# EAGLE board TSOC_ESP32S (EAGLE 6.6.0)
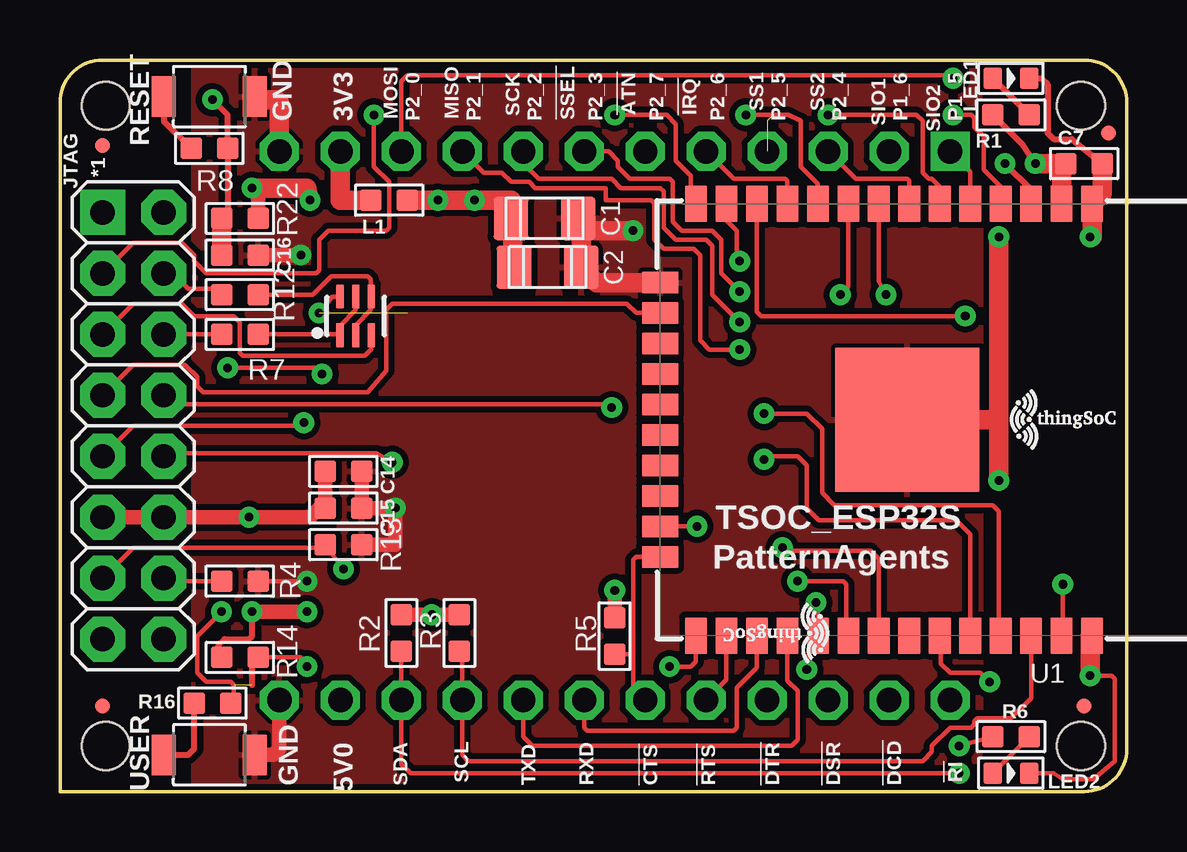
[diagram p0: board, top side]
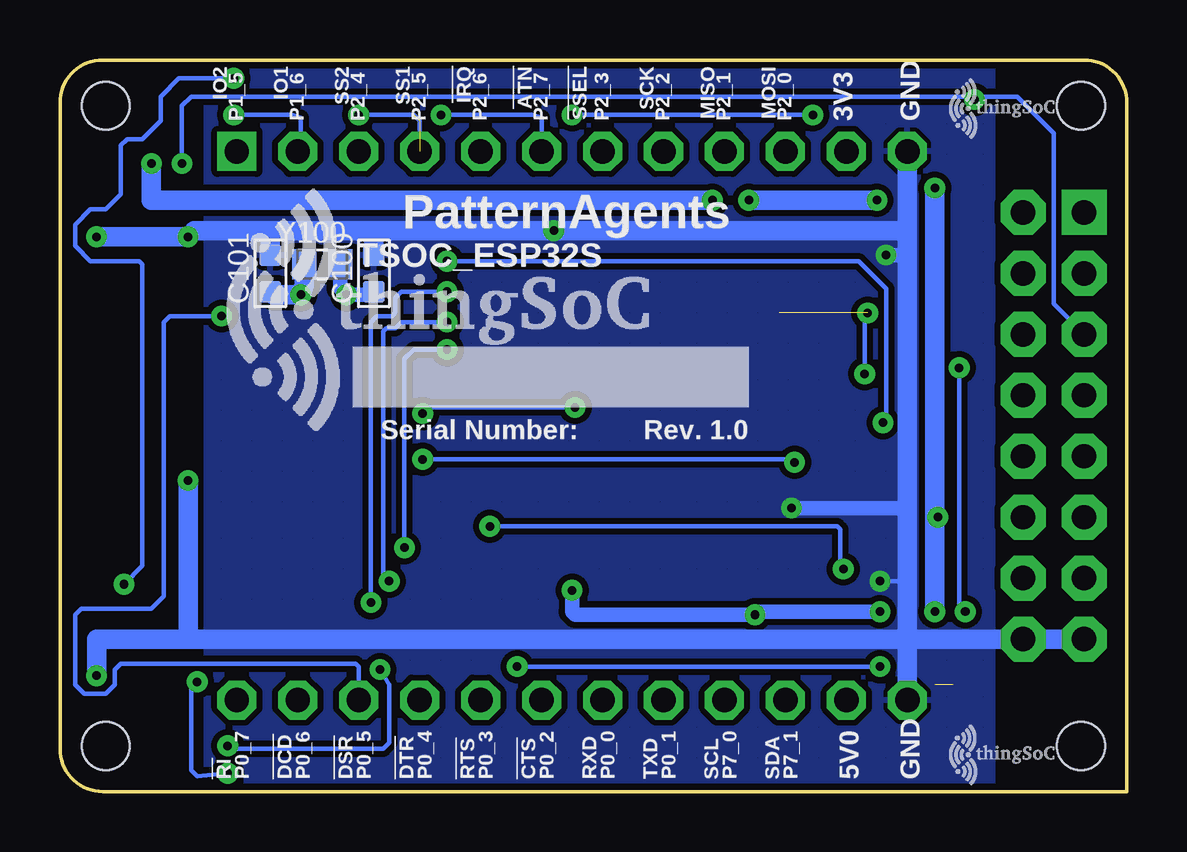
[diagram p1: board, bottom side, seen from below]

Size 44.45 x 30.48 mm. Coordinates in mm from the lower left corner, seen from the top.
Copper layers (1*16): Top 0.035mm / dielectric 1.5mm / Bottom 0.035mm
Design rules "PatternAgents_7mil": minimum track width 7mil, minimum drill 14mil, track to track 7mil, track to pad 7mil, pad to pad 7mil, via to via 7mil, smd to smd 7mil, copper to edge 7mil, drill to drill 7mil, minimum pad ring 12mil, minimum via ring 10mil, stop-mask expansion 4mil, vias tented up to drill 25mil, thermal gap 7mil
Net classes: 1 vcc: width 0.254 mm

## Footprints (pad centres in the part's own frame; a part is rotated, then mirrored left to right if it is on the bottom)
C1206 = smd 1.8 x 1.45: 1 0,1.4; 2 0,-1.4
C0603 = smd 0.889 x 0.889: 1 0,0.762; 2 0,-0.762
MICRO-FIDUCIAL = smd 0.635 x 0.635: 1 0,0
2X8 = drill 1.016 pad 1.88 square: 1 0,0 | drill 1.016 pad 1.88 octagon: 2 0,2.54; 3 2.54,0; 4 2.54,2.54; 5 5.08,0; 6 5.08,2.54; 7 7.62,0; 8 7.62,2.54; 9 10.16,0; 10 10.16,2.54; 11 12.7,0; 12 12.7,2.54; 13 15.24,0; 14 15.24,2.54; 15 17.78,0; 16 17.78,2.54
L0603 = smd 0.889 x 0.889: 1 -0.762,0; 2 0.762,0
LED-0603 = smd 0.762 x 0.889: + -0.762,0; - 0.762,0
SOT363 = smd 0.3 x 0.99: 1 -0.65,-0.8; 2 0,-0.8; 3 0.65,-0.8; 4 0.65,0.81; 5 0,0.81; 6 -0.65,0.81
R0603 = smd 0.889 x 0.889: 1 0,0.762; 2 0,-0.762
SW2-2.6-3.0X2.5X1.2+0.4MM = smd 1 x 1.7: 1 -1.9,0; 2 1.9,0
TSOC-BB-S24 = drill 1.016 square: 1B -11.43,11.43 | drill 1.016 octagon: 1C 11.43,11.43; 2B -11.43,8.89; 2C 11.43,8.89; 3B -11.43,6.35; 3C 11.43,6.35; 4B -11.43,3.81; 4C 11.43,3.81; 5B -11.43,1.27; 5C 11.43,1.27; 6B -11.43,-1.27; 6C 11.43,-1.27; 7B -11.43,-3.81; 7C 11.43,-3.81; 8B -11.43,-6.35; 8C 11.43,-6.35; 9B -11.43,-8.89; 9C 11.43,-8.89; 10B -11.43,-11.43; 10C 11.43,-11.43; 11B -11.43,-13.97; 11C 11.43,-13.97; 12B -11.43,-16.51; 12C 11.43,-16.51
ESP-32S = smd 0.9 x 1.5: 1 7.7,9; 2 6.43,9; 3 5.16,9; 4 3.89,9; 5 2.62,9; 6 1.35,9; 7 0.08,9; 8 -1.19,9; 9 -2.46,9; 10 -3.73,9; 11 -5,9; 12 -6.27,9; 13 -7.54,9; 14 -8.81,9; 25 -8.81,-9; 26 -7.54,-9; 27 -6.27,-9; 28 -5,-9; 29 -3.73,-9; 30 -2.46,-9; 31 -1.19,-9; 32 0.08,-9; 33 1.35,-9; 34 2.62,-9; 35 3.89,-9; 36 5.16,-9; 37 6.43,-9; 38 7.7,-9 | smd 1.5 x 0.9: 15 -10.3,5.715; 16 -10.3,4.445; 17 -10.3,3.175; 18 -10.3,1.905; 19 -10.3,0.635; 20 -10.3,-0.635; 21 -10.3,-1.905; 22 -10.3,-3.175; 23 -10.3,-4.445; 24 -10.3,-5.715 | smd 6 x 6: GND 0,0
TSOC-BB-BRD-DIM = hole 2: 13.335,16.891; -13.335,16.891; 13.335,-23.749; -13.335,-23.749
X2-SMD-L2.0X1.2X0.55MM = smd 1 x 1.25: 1 -0.75,0; 2 0.75,0

## Placement (x,y rotation side)
$$U$1  TSOC-LOGO-SMALL  [TSOC-LOGO-SML]  31.24,6.6 180 top
$$U$2  TSOC-LOGO-SMALL  [TSOC-LOGO-SML]  40.39,15.49 0 top
C1  47u  [C1206]  20.19,23.88 270 top
C2  47u  [C1206]  20.32,21.84 270 top
C7  10uf  [C0603]  42.67,26.16 270 top
C14  100nf  [C0603]  11.81,13.34 90 top
C15  1uf  [C0603]  11.81,11.81 90 top
C16  100nf  [C0603]  7.49,22.35 90 top
C100  12pf  [C0603]  31.37,21.59 180 bottom
C101  12pf  [C0603]  35.69,21.59 180 bottom
FID1  FIDUCIALUFIDUCIAL  [MICRO-FIDUCIAL]  43.69,27.43 0 top
FID2  FIDUCIALUFIDUCIAL  [MICRO-FIDUCIAL]  42.67,3.56 0 top
FID3  FIDUCIALUFIDUCIAL  [MICRO-FIDUCIAL]  1.78,26.92 0 top
FID4  FIDUCIALUFIDUCIAL  [MICRO-FIDUCIAL]  1.78,3.56 0 top
JTAG  [2X8]  1.78,24.13 270 top
L1  330OHM-500MA  [L0603]  13.72,24.64 180 top
LED1  GREEN-0603  [LED-0603]  39.62,29.72 0 top
LED2  YELLOW-0603  [LED-0603]  39.62,0.76 0 top
Q1  MMBT2222A  [SOT363]  12.32,19.81 0 top
R1  1K 1/10W  [R0603]  39.62,28.19 270 top
R2  10K 1/10W  [R0603]  14.22,6.6 180 top
R3  10K 1/10W  [R0603]  16.64,6.6 180 top
R4  10K 1/10W  [R0603]  7.49,8.76 270 top
R5  10K 1/10W  [R0603]  23.11,6.48 180 top
R6  1K 1/10W  [R0603]  39.62,2.29 270 top
R7  10K 1/10W  [R0603]  7.49,19.05 90 top
R8  220R  [R0603]  6.22,26.8 90 top
R12  10K 1/10W  [R0603]  7.49,20.7 90 top
R13  10K 1/10W  [R0603]  11.81,10.29 270 top
R14  10K 1/10W  [R0603]  7.49,5.59 270 top
R16  220R  [R0603]  6.35,3.68 90 top
R22  10K 1/10W  [R0603]  7.49,23.88 90 top
RESET  B3U-1000P-2P-SMD  [SW2-2.6-3.0X2.5X1.2+0.4MM]  6.22,28.96 0 top
TSOC  TSOC-24-BB  [TSOC-BB-S24]  25.65,15.24 270 top
U1  ESP-32S  [ESP-32S]  35.31,15.49 0 top
U$1  TSOC-PCB-SINGLE  [TSOC-BB-BRD-DIM]  25.65,15.24 270 top
U$100  TSOC-LOGO-LRG  [TSOC-LOGO-LRG]  34.29,20.07 0 bottom
U$101  TSOC-LOGO-SMALL  [TSOC-LOGO-SML]  6.6,28.45 0 bottom
U$102  TSOC-LOGO-SMALL  [TSOC-LOGO-SML]  6.6,1.52 0 bottom
USER  B3U-1000P-2P-SMD  [SW2-2.6-3.0X2.5X1.2+0.4MM]  6.22,1.52 0 top
Y100  3.2768KHZ  [X2-SMD-L2.0X1.2X0.55MM]  33.53,21.97 0 bottom

## Library data of the parts
$$U$1 $$U$2 TSOC U$1 U$100-U$102 = thingSoC
C1 C2 = we-rcl
C7 = Seeed-Capacitor-2016; MPN: CC0603KRX5R6BB106
C14 C16 = Seeed-Capacitor-2016; MPN: CC0603KRX7R9BB104
C15 = Seeed-Capacitor-2016; MPN: CC0603KRX7R8BB105
C100 C101 = Seeed-Capacitor-2016; MPN: CC0603JRNPO9BN120
FID1-FID4 = TSOC-ESP8266-BASE
JTAG = PatternAgents-ProtoPads
L1 = Seeed-Inductor-2016; MPN: BLM18AG121SN1D
LED1 = Seeed-LED-2016; MPN: 19-217-G7C-AN1P2-3T
LED2 = Seeed-LED-2016; MPN: 19-217-Y5C-AM1N1VY-3T
Q1 = SparkFun-DiscreteSemi
R1 R6 = Seeed-Resistor-2016; MPN: RC0603JR-071KL
R2-R5 R7 R12-R14 R22 = Seeed-Resistor-2016; MPN: RC0603JR-0710KL
R8 R16 = Seeed-Resistor-2016; MPN: RC0603JR-07220RL
RESET USER = Seeed-Switch-2016; MPN: B3U-1000P-2P-SMD
U1 = PatternAgents_RFmodules
Y100 = Seeed-Crystal Oscillator-2016; MPN: FC-12M

## Nets
3V3: L1.2 TSOC.11B
5V0: TSOC.11C
!CTS: JTAG.14 R4.2
!DBG: JTAG.1
!DSR: JTAG.2
!DTR: JTAG.6 R7.1
!RST: C16.1 JTAG.5 Q1.3 R8.2 R22.1 U1.3
!RTS: JTAG.4 R12.1
CLK: U1.20
CMD: U1.19
GND: C1.1 C2.1 C7.1 C14.2 C15.2 C16.2 C100.2 C101.2 JTAG.15 JTAG.16 LED1.- LED2.- R4.1 R13.1 RESET.2 TSOC.12B TSOC.12C U1.1 U1.15 U1.38 U1.GND USER.2
IO0: Q1.6 R14.1 R16.2 U1.25
IO1: JTAG.8 U1.35
IO2: R5.1 TSOC.6C U1.24
IO3: JTAG.10 U1.34
IO4: TSOC.5C U1.26
IO5: R6.2 TSOC.7B U1.29
IO12: JTAG.3 U1.14
IO13: JTAG.7 U1.16
IO14: JTAG.9 U1.13
IO15: JTAG.13 R13.2 U1.23
IO16: TSOC.7C U1.27
IO17: TSOC.8C U1.28
IO18: TSOC.8B U1.30
IO19: TSOC.9B U1.31
IO21: R2.1 TSOC.10C U1.33
IO22: R3.1 TSOC.9C U1.36
IO23: TSOC.10B U1.37
IO25: TSOC.6B U1.10
IO26: TSOC.5B U1.11
IO27: TSOC.3C U1.12
IO32: C101.1 U1.8 Y100.1
IO33: C100.1 U1.9 Y100.2
IO34: TSOC.4B U1.6
IO35: TSOC.3B U1.7
IO36: TSOC.2B U1.4
IO39: TSOC.1B U1.5
N$1: LED2.+ R6.1
N$2: R16.1 USER.1
N$3: R8.1 RESET.1
N$17: LED1.+ R1.1
RES: Q1.1 Q1.5 R7.2
ROS: Q1.2 Q1.4 R12.2
SD0: U1.21
SD1: U1.22
SD2: U1.17
SD3: U1.18
VCC: C1.2 C2.2 C7.2 C14.1 C15.1 JTAG.11 JTAG.12 L1.1 R1.2 R2.2 R3.2 R5.2 R14.2 R22.2 U1.2

## Tracks (layer width: path | path; a pad name or v marks a point on that pad's centre or on a via)
3V3
  Top 0.813: TSOC.11B 11.68,24.64 L1.2
!CTS
  Top 0.178: R4.2 4.45,8.76 JTAG.14
!DTR
  Top 0.178: R7.1 JTAG.6
!RST  (via drill 0.36)
  Top 0.178: Q1.3 12.97,18.43 12.7,18.16 7.62,18.16 7.49,18.29 7.49,19.56 7.24,19.81 5.59,19.81 5.08,20.32 3.05,20.32 JTAG.5
  Top 0.254: U1.3 40.47,25.07 v39.37,26.16 | v6.35,28.83 6.99,28.19 R8.2 6.99,24.13 R22.1
  Top 0.813: R22.1 C16.1
  Bottom 0.178: v39.37,26.16 39.37,28.57 38.99,28.96 6.48,28.96 v6.35,28.83 6.22,28.96 4.57,28.96 3.05,27.43 3.05,20.32 JTAG.5
!RTS
  Top 0.178: JTAG.4 4.7,21.59 5.33,20.95 6.48,20.95 R12.1
GND  (via drill 0.36)
  Top 0.178: LED2.- 41.4,0.76 41.78,0.51 43.05,0.51 43.94,1.27 43.94,4.7 43.81,4.83 v42.93,4.83 | R4.1 v10.29,8.76
  Top 0.254: LED1.- 40.89,29.72 41.15,29.46 41.15,27.43 41.4,27.18 42.16,27.18 C7.1
  Top 0.61: C16.2 v10.03,22.35 | USER.2 8.89,1.52 9.14,1.78 TSOC.12C | C14.2 C15.2 v13.97,11.81 13.97,10.29 R13.1
  Top 0.813: v42.93,23.11 43.01,23.11 U1.1 43.43,24.92 C7.1 | 25.15,21.21 U1.15 22.36,21.21 C2.1 21.72,23.37 | U1.38 42.93,6.49 v42.93,4.83 | v39.12,23.11 39.12,15.49 | 39.12,15.49 v39.12,12.95 | U1.GND 39.12,15.49 | C1.1 21.72,23.37 | TSOC.12B 9.14,28.7 9.02,28.83 8.25,28.83 RESET.2 | v23.88,23.37 21.72,23.37
  Bottom 0.178: v10.29,8.76 9.14,8.76
  Bottom 0.61: v10.03,22.35 9.14,22.35 | v13.97,11.81 9.27,11.81 9.14,11.94
  Bottom 0.813: TSOC.12B 9.14,23.37 | 9.14,23.37 v23.88,23.37 31.5,23.37 | JTAG.15 JTAG.16 9.14,6.35 | 9.14,6.35 39.12,6.35 | 39.12,6.35 42.93,6.35 v42.93,4.83 | TSOC.12C 9.14,6.35 | 9.14,23.37 9.14,22.35 9.14,11.94 9.14,8.76 9.14,6.35 | v39.12,12.95 39.12,6.35 | 31.5,23.37 35.56,23.37 | 35.56,23.37 38.86,23.37 v39.12,23.11 v42.93,23.11 | C100.2 31.37,23.24 31.5,23.37 | C101.2 35.69,23.24 35.56,23.37
  pour Top (isolate 0.254, hatched): 5.59,0 5.59,30.48 38.35,30.48 38.35,0
  pour Bottom (isolate 0.254, hatched): 5.59,0 5.59,30.48 38.35,30.48 38.35,0
IO0  (via drill 0.36)  (2 unrouted)
  Top 0.178: 26.5,5.92 U1.25 26.5,5.41 26.29,5.21 v25.4,5.21 | R14.1 10.03,5.59 v10.29,5.21 | Q1.6 11.35,20.62 v10.79,19.94 | 7.24,3.68 7.24,4.45 7.11,4.57 6.1,4.57 5.71,4.95 5.71,6.48 v6.73,7.49 | v6.99,17.65 10.67,17.65 v10.92,17.4
  Top 0.254: R16.2 7.24,3.68 | 8,4.45 8,5.46 R14.1
  Bottom 0.178: v25.4,5.21 v10.29,5.21 | v6.73,7.49 6.99,7.75 v6.99,17.65 | v10.92,17.4 10.92,19.81 v10.79,19.94
IO1  (via drill 0.36)
  Top 0.178: JTAG.8 4.45,16.51 4.83,16.13 22.86,16.13 v22.99,16 | v29.34,15.75 31.11,15.75 31.75,15.11 31.75,12.45 32.26,11.94 38.86,11.94 39.12,11.68 39.12,6.57 U1.35
  Bottom 0.178: v22.99,16 29.08,16 v29.34,15.75
IO2
  Top 0.178: U1.24 24,9.78 23.88,9.65 23.88,5.59 | 23.88,5.59 23.88,4.32 TSOC.6C | R5.1 23.75,5.71 23.88,5.59
IO3  (via drill 0.36)
  Top 0.178: U1.34 37.93,10.71 37.34,11.3 31.62,11.3 31.11,11.81 31.11,13.59 30.73,13.97 29.46,13.97 v29.34,13.84 | v13.84,13.72 13.21,14.1 4.45,14.1 JTAG.10
  Bottom 0.178: v29.34,13.84 13.97,13.84 v13.84,13.72
IO4
  Top 0.178: U1.26 27.77,4.65 TSOC.5C
IO5  (via drill 0.36)
  Top 0.178: 31.62,6.45 U1.29 | R6.2 v37.47,1.91 | v31.11,5.08 31.24,6.16 U1.29 | TSOC.7B 22.86,26.67 23.24,26.29 23.24,26.04 23.75,25.53 25.4,25.53 25.53,25.4 25.53,23.75 25.91,23.37 27.18,23.37 27.56,22.99 27.56,21.59 v28.32,20.83 | U1.29 31.58,7.79 v31.5,7.87
  Bottom 0.178: v31.11,5.08 30.73,4.45 30.73,2.03 30.99,1.78 37.34,1.78 v37.47,1.91 | v31.5,7.87 31.5,19.56 31.24,19.81 30.61,19.81 30.48,19.94 30.48,20.57 30.23,20.83 v28.32,20.83
IO12  (via drill 0.36)
  Top 0.178: JTAG.3 3.05,22.86 5.08,22.86 5.59,22.35 5.59,22.1 6.1,21.59 10.67,21.59 10.79,21.72 10.79,22.99 11.18,23.37 13.59,23.37 13.72,23.5 13.72,25.4 13.08,26.04 v13.08,28.19 | v23.11,28.19 25.27,28.19 25.65,27.81 25.65,26.29 26.29,25.65 26.29,24.7 U1.14
  Bottom 0.178: v13.08,28.19 v23.11,28.19
IO13
  Top 0.178: U1.16 24,19.94 23.62,20.32 13.84,20.32 13.59,20.07 13.59,17.53 12.83,16.64 5.97,16.64 5.71,16.89 5.71,17.27 5.21,17.78 3.05,17.78 JTAG.7
IO14  (via drill 0.36)
  Top 0.178: U1.13 27.77,23.8 28.19,23.37 28.19,22.23 v28.32,22.1 | v10.16,15.37 10.03,15.37 9.91,15.24 3.05,15.24 JTAG.9
  Bottom 0.178: v28.32,22.1 11.18,22.1 10.03,20.95 10.03,15.49 v10.16,15.37
IO15  (via drill 0.36)
  Top 0.178: JTAG.13 3.05,10.16 10.92,10.16 R13.2 v11.81,9.27 | v26.54,11.05 U1.23
  Bottom 0.178: v26.54,11.05 12.06,11.05 11.94,10.92 11.94,9.4 v11.81,9.27
IO16
  Top 0.178: U1.27 29.04,5.16 28.19,4.32 28.19,2.67 28.07,2.54 21.97,2.54 21.84,2.67 TSOC.7C
IO17
  Top 0.178: U1.28 30.31,4.62 30.73,4.19 30.73,2.16 30.48,1.91 19.68,1.91 19.3,2.29 TSOC.8C
IO18  (via drill 0.36)
  Top 0.178: TSOC.8B 19.3,26.16 19.94,25.53 22.99,25.53 23.37,25.15 25.02,25.15 25.15,25.02 25.15,23.5 25.65,22.99 26.92,22.99 27.18,22.73 27.18,20.7 v28.32,19.56 | v30.73,8.76 32.64,8.76 32.77,8.64 32.77,6.57 U1.30
  Bottom 0.178: v28.32,19.56 30.23,19.56 30.48,19.3 30.86,19.3 30.99,19.18 30.99,8.89 v30.73,8.76
IO19  (via drill 0.36)
  Top 0.178: TSOC.9B 17.65,25.78 18.41,25.78 18.8,25.4 19.56,25.4 19.81,25.15 22.73,25.15 22.73,24.64 24.64,24.64 24.77,24.51 24.77,22.99 25.15,22.61 26.42,22.61 26.67,22.35 26.67,18.8 27.05,18.41 v28.32,18.41 | U1.31 34.12,9.7 33.78,10.03 30.23,10.03 v30.1,10.16
  Bottom 0.178: v30.1,10.16 30.1,18.03 29.72,18.41 v28.32,18.41
IO21  (via drill 0.36)
  Top 0.178: v37.47,0.76 14.61,0.76 14.22,1.14 TSOC.10C R2.1 | v38.73,4.57 38.35,4.95 37.08,4.95 36.7,5.33 36.7,6.45 U1.33
  Bottom 0.178: v37.47,0.76 38.73,0.64 38.99,0.89 38.99,4.45 v38.73,4.57
IO22
  Top 0.178: U1.36 40.47,3.89 39.62,3.05 38.23,3.05 38.1,2.92 38.1,2.79 37.97,2.67 37.08,2.67 36.32,1.91 36.32,1.65 35.94,1.27 17.02,1.27 16.76,1.52 TSOC.9C 16.76,5.71 R3.1
IO23  (via drill 0.36)
  Top 0.178: TSOC.10B 14.22,29.59 14.48,29.84 37.08,29.84 v37.21,29.72 | v41.78,8.64 41.78,6.54 U1.37
  Bottom 0.178: v37.21,29.72 39.5,29.72 40.26,28.96 40.26,27.94 41.02,27.18 41.66,27.18 41.91,26.92 41.91,24.89 42.55,24.26 43.18,24.26 43.81,23.62 43.81,22.73 43.18,22.1 41.15,22.1 41.02,21.97 41.02,9.4 v41.78,8.64
IO25  (via drill 0.36)
  Top 0.178: U1.10 31.58,25.32 30.86,26.04 30.86,27.94 30.35,28.19 v28.57,28.19
  Bottom 0.178: v28.57,28.19 24.77,28.19 24.38,28.07 TSOC.6B
IO26
  Top 0.178: U1.11 30.31,25.45 30.23,25.53 28.07,25.53 TSOC.5B
IO27  (via drill 0.36)
  Top 0.178: U1.12 29.04,19.99 29.21,19.81 v37.72,19.81
  Bottom 0.178: v37.72,19.81 39.88,19.81 40.13,19.56 40.13,8.13 40.64,7.62 43.56,7.62 43.81,7.37 43.81,4.45 43.43,4.06 42.55,4.06 42.16,4.45 42.16,5.08 41.91,5.33 32.13,5.33 32,5.21 TSOC.3C
IO32  (via drill 0.36)
  Top 0.178: U1.8 34.12,21.26 v34.42,20.7
  Bottom 0.813: Y100.1 34.28,21.09 v34.42,20.7 35.56,20.7 C101.1
IO33  (via drill 0.36)
  Top 0.178: U1.9 32.85,21.04 v32.51,20.7
  Bottom 0.61: C100.1 31.5,20.7 v32.51,20.7 32.78,20.97 Y100.2
IO34  (via drill 0.36)  (2 unrouted)
  Top 0.178: U1.6 36.66,25.19 36.32,25.53 36.2,25.53 35.94,25.78 35.94,27.94 35.69,28.19 v32,28.19
  Bottom 0.178: v32,28.19 29.72,28.19 29.46,27.94 TSOC.4B
IO35
  Top 0.178: U1.7 35.39,25.45 35.31,25.53 33.15,25.53 TSOC.3B
IO36  (via drill 0.36)
  Top 0.178: U1.4 39.2,25.19 38.48,25.91 38.48,27.3 38.1,27.69 38.1,28.07 37.97,28.19 v37.21,28.19
  Bottom 0.178: v37.21,28.19 34.8,28.19 34.42,28.07 34.42,26.8 TSOC.2B
IO39
  Top 0.178: U1.5 37.93,25.83 TSOC.1B
N$1
  Top 0.178: LED2.+ R6.1
N$2
  Top 0.254: USER.1 5.33,1.52 5.59,1.78 R16.1
N$3
  Top 0.254: RESET.1 4.32,27.93 R8.1
N$17
  Top 0.254: R1.1 LED1.+
RES
  Top 0.178: Q1.5 12.32,20.07 11.67,19.42 Q1.1 11.63,19.05 R7.2
ROS
  Top 0.178: Q1.2 12.32,19.43 12.95,20.07 12.95,20.61 Q1.4 12.95,20.64 12.95,21.34 12.83,21.46 11.3,21.46 10.54,20.7 R12.2
VCC  (via drill 0.36)
  Top 0.178: U1.2 41.74,24.64
  Top 0.254: v40.64,26.16 40.13,26.92 R1.2 | R14.2 6.6,6.1 6.86,6.35 7.87,6.35 8,6.48 v8,7.49
  Top 0.61: 8.13,25.02 v8,25.15 8.26,24.89 R22.2 | JTAG.11 JTAG.12 v7.87,11.43 10.41,11.43 10.79,11.81 C15.1 C14.1 | 14.1,7.49 R2.2 v15.49,7.37 R3.2 | R5.2 v23.11,8.38 | v8,7.49 v10.29,7.49
  Top 0.813: C2.2 C1.2 | 18.67,24.13 C1.2 | v40.64,26.16 C7.2 41.74,26.08 41.74,24.64 | C1.2 18.8,24 18.8,24.64 v17.27,24.64 v15.75,24.64 L1.1 | v8,25.15 10.29,25.15 v10.41,24.64
  Bottom 0.61: v7.87,11.43 8,11.3 | v23.11,8.38 23.11,7.49 22.99,7.37 v15.49,7.37 15.37,7.49 v10.29,7.49
  Bottom 0.813: v17.27,24.64 40.64,24.64 v40.64,26.16 | v8,7.49 8,11.3 v8,25.15 | v10.41,24.64 v15.75,24.64

## Text on the board
tPlace: MOSI | MISO | SCK | !SSEL | !ATN | !IRQ | SS1 | SS2 | SIO1 | SIO2 | GND | 3V3 | P2_0 | P2_1 | P2_2 | P2_3 | P2_7 | P2_6 | P2_5 | P2_4 | P1_6 | P1_5 | *1 | TSOC_ESP32S | PatternAgents | GND | 5V0 | SDA | SCL | TXD | RXD | !CTS | !RTS | !DTR | !DSR | !DCD | !RI
bPlace: MOSI | MISO | SCK | !SSEL | !ATN | !IRQ | SS1 | SS2 | IO1 | IO2 | GND | 3V3 | P2_0 | P2_1 | P2_2 | P2_3 | P2_7 | P2_6 | P2_5 | P2_4 | P1_6 | P1_5 | PatternAgents | TSOC_ESP32S | Rev. 1.0 | Serial Number: | GND | 5V0 | P7_1 | SDA | P7_0 | SCL | P0_1 | TXD | P0_0 | RXD | P0_2 | !CTS | P0_3 | !RTS | P0_4 | !DTR | P0_5 | !DSR | P0_6 | !DCD | P0_7 | !RI